# Altium PCB BASE.PcbDoc (part 2 of 5)
Units mil, origin at the board's own origin, x right, y up, seen from the top; angles counter-clockwise.
Board outline 4330.71 x 3937.01 mil, 6 copper layers (Top, GND1, SIG1, PWR, GND2, Bottom), stack 32.112 mil thick; 57 components, 250 nets, 665 pads, 350 vias.
Unrouted connection lines stored in the file: 2.
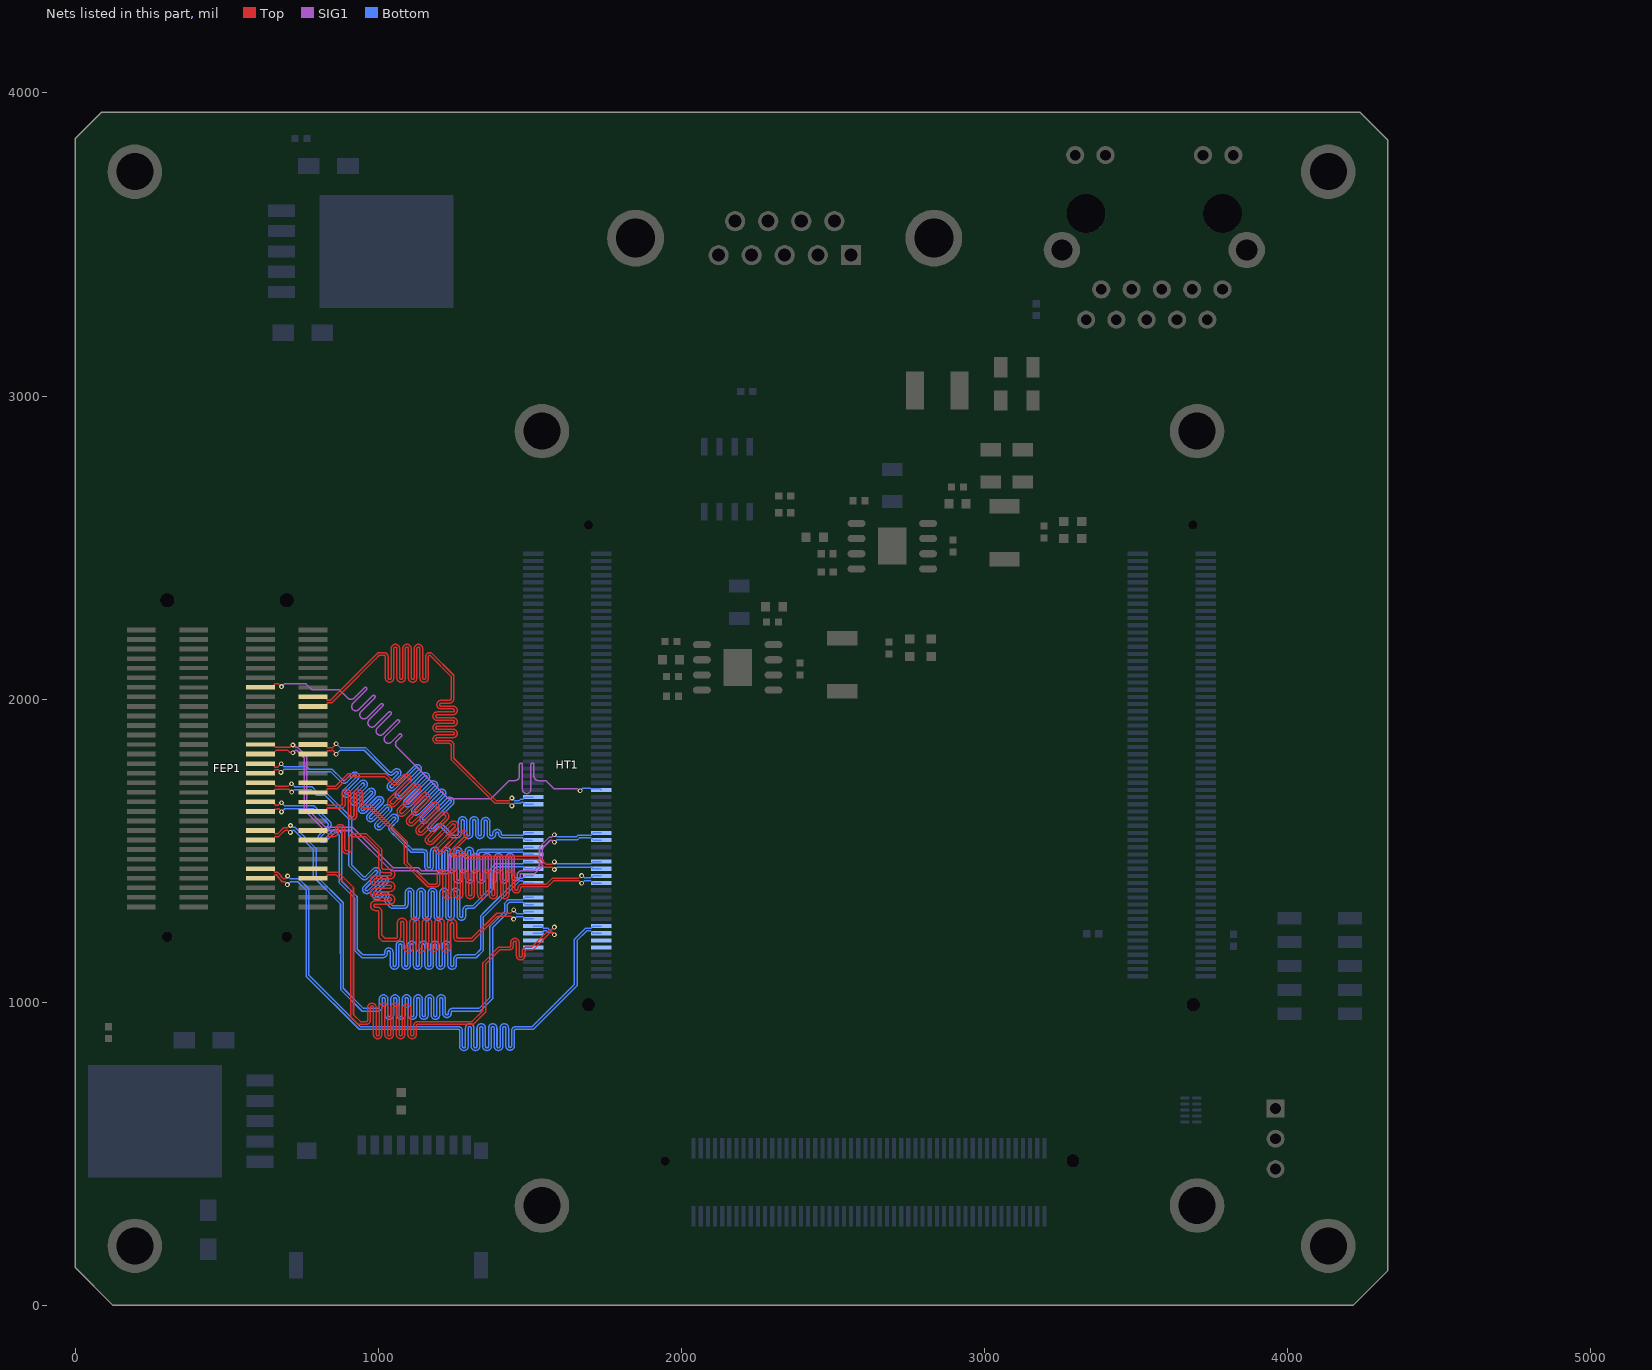
[diagram p6: the nets of this part, all layers, seen from the top]

## Via types
v1: diameter 16, hole 8, Top to Bottom, 219 vias
v2: diameter 30, hole 15, Top to Bottom, 75 vias
v3: diameter 22, hole 12, Top to Bottom, 48 vias
v4: diameter 28, hole 14, Top to Bottom, 3 vias
v5: diameter 39.37, hole 39.37, Top to Bottom, 2 vias
v6: diameter 24, hole 12, Top to Bottom, 2 vias
v7: diameter 40, hole 20, Top to Bottom, 1 vias

## Nets (pads, with @x,y where several pads share a name; then routed paths per layer and width w, separated by ;. In a path a pad name is that pad's centre, name@x,y a point inside that pad or via, vN(x,y) a via of type N, cw(c..) or ccw(c..) an arc to the next point about the centre after c; other vN are vias at no path point) (continued)
B12_L5_N: FEP1.A18 HT1.B16 | length 2428.8
  Top w5: FEP1.A18@784.41,1692.91 824.98,1692.91 828.98,1696.91 828.98,1701.23 831.91,1704.16 862.71,1704.16 903.2,1744.65 1021.6,1744.65 ; 1025.02,1741.24 1039.87,1726.39 1043.5,1722.75 1044.78,1721.47 ccw(c1055.78,1732.4) 1066.76,1721.46 1087.58,1742.29 cw(c1092.21,1737.71) 1096.79,1733.11 ; 1035.09,1649.54 cw(c1046.08,1660.47) 1035.13,1671.44 1096.78,1733.09 ; 1035.15,1649.48 ccw(c1046.08,1660.47) 1057.05,1649.52 1118.7,1711.17 ; 1066.2,1618.43 cw(c1077.19,1629.36) 1066.24,1640.33 1127.89,1701.98 ccw(c1123.32,1706.6) 1118.71,1711.19 ; 1066.26,1618.37 ccw(c1077.19,1629.36) 1088.16,1618.41 1149.81,1680.06 cw(c1154.43,1675.49) 1159.01,1670.88 ; 1097.31,1587.32 cw(c1108.3,1598.25) 1097.35,1609.22 1159,1670.87 ; 1097.37,1587.26 ccw(c1108.3,1598.25) 1119.27,1587.3 1180.92,1648.95 ; 1128.42,1556.2 cw(c1139.41,1567.13) 1128.46,1578.1 1190.12,1639.75 ccw(c1185.54,1644.38) 1180.94,1648.96 ; 1128.48,1556.14 ccw(c1139.41,1567.13) 1150.39,1556.18 1212.04,1617.83 cw(c1216.66,1613.26) 1221.24,1608.65 ; 1159.54,1525.09 cw(c1170.53,1536.02) 1159.58,1546.99 1221.23,1608.64 ; 1159.6,1525.03 ccw(c1170.53,1536.02) 1181.5,1525.07 1243.15,1586.72 ; 1190.65,1493.98 cw(c1201.64,1504.91) 1190.69,1515.88 1252.34,1577.53 ccw(c1247.77,1582.15) 1243.16,1586.73 ; 1190.71,1493.92 ccw(c1201.64,1504.91) 1212.61,1493.96 1274.26,1555.61 cw(c1278.88,1551.04) 1283.47,1546.43 1243.3,1506.26 ccw(c1254.25,1495.29) 1243.26,1484.36 ; 1243.32,1484.3 ccw(c1254.25,1495.29) 1265.22,1484.34 1268.94,1488.07 cw(c1273.56,1483.5) 1278.19,1488.06 1293.47,1472.79 1301.38,1472.79 1521.48,1472.79 1548.12,1446.15 1572.28,1446.15 1580.28,1438.15 v1(1580.71,1438.15)
  Bottom w5: v1(1580.71,1438.15) 1581.68,1438.15 1589.14,1445.61 1701.22,1445.61 1701.73,1445.1 1704.15,1445.1 1708.54,1440.71 HT1.B16@1735.12,1440.71
B12_L5_P: FEP1.A17 HT1.B17 | length 2433.5
  Top w5: FEP1.A17@784.41,1724.41 823.78,1724.41 829.15,1719.04 829.15,1716.09 832.08,1713.16 858.98,1713.16 899.48,1753.65 1025.33,1753.65 1030.51,1748.47 1046.23,1732.75 1049.86,1729.12 1051.16,1727.82 ccw(c1055.78,1732.4) 1060.39,1727.82 1081.24,1748.66 cw(c1092.21,1737.71) 1103.16,1726.74 1041.51,1665.09 ccw(c1046.08,1660.47) 1041.48,1655.88 ccw(c1046.08,1660.47) 1050.69,1655.89 1112.35,1717.55 cw(c1123.32,1706.6) 1134.27,1695.63 1072.62,1633.98 ; 1072.61,1633.97 ccw(c1077.19,1629.36) 1072.59,1624.76 ccw(c1077.19,1629.36) 1081.8,1624.78 ; 1081.81,1624.79 1143.46,1686.44 cw(c1154.43,1675.49) 1165.38,1664.52 1103.73,1602.87 ccw(c1108.3,1598.25) 1103.71,1593.65 ccw(c1108.3,1598.25) 1112.91,1593.66 1174.57,1655.33 cw(c1185.54,1644.38) 1196.49,1633.41 1134.84,1571.76 ; 1134.83,1571.74 ccw(c1139.41,1567.13) 1134.82,1562.54 ccw(c1139.41,1567.13) 1144.02,1562.55 ; 1144.04,1562.56 1205.69,1624.21 cw(c1216.66,1613.26) 1227.61,1602.29 1165.96,1540.64 ccw(c1170.53,1536.02) 1165.93,1531.42 ccw(c1170.53,1536.02) 1175.14,1531.44 1236.8,1593.1 cw(c1247.77,1582.15) 1258.72,1571.18 1197.07,1509.53 ; 1197.06,1509.52 ccw(c1201.64,1504.91) 1197.04,1500.31 ccw(c1201.64,1504.91) 1206.25,1500.33 ; 1206.26,1500.34 1267.91,1561.99 cw(c1278.88,1551.04) 1289.83,1540.07 1249.68,1499.91 ccw(c1254.25,1495.29) 1249.65,1490.69 ccw(c1254.25,1495.29) 1258.86,1490.71 1262.58,1494.43 ; 1262.58,1494.43 cw(c1273.56,1483.5) 1283.02,1495.77 1283.21,1495.77 1284.51,1494.47 ; 1284.54,1494.44 1297.19,1481.79 1310.38,1481.79 1527.71,1481.79 1554.34,1455.15 1572.28,1455.15 1580.28,1463.15 v1(1580.71,1463.15)
  Bottom w5: v1(1580.71,1463.15) 1582.75,1463.15 1589.14,1456.76 1659.36,1456.76 1659.62,1457.02 1701.23,1457.02 1708.54,1464.33 HT1.B17@1735.12,1464.33
B12_L6_N: FEP1.A20 HT1.B14 | length 2433.5
  Top w5: FEP1.A20@784.41,1629.92 823.78,1629.92 829.15,1635.3 829.15,1638.24 832.08,1641.17 869.8,1641.17 876.8,1641.17 ccw(c876.8,1655.17) 890.8,1655.17 890.8,1688.37 cw(c895.8,1688.37) 900.8,1688.37 900.8,1616.17 ccw(c914.8,1616.17) 928.8,1616.17 928.8,1688.37 cw(c933.8,1688.37) 938.8,1688.37 938.8,1655.17 ccw(c952.8,1655.17) 952.8,1641.17 970.42,1641.17 971.37,1640.22 1086.31,1525.28 1086.31,1457.65 1162.96,1381 1182.15,1381 1189.15,1381 ccw(c1189.15,1395) 1203.15,1395 1203.15,1424 cw(c1208.15,1424) 1213.15,1424 1213.15,1356 ccw(c1227.15,1356) 1241.15,1356 1241.15,1424 cw(c1246.15,1424) 1251.15,1424 1251.15,1356 ccw(c1265.15,1356) 1279.15,1356 1279.15,1424 cw(c1284.15,1424) 1289.15,1424 1289.15,1356 ccw(c1303.15,1356) 1317.15,1356 1317.15,1424 cw(c1322.15,1424) 1327.15,1424 1327.15,1356 ccw(c1341.15,1356) 1355.15,1356 1355.15,1424 cw(c1360.15,1424) 1365.15,1424 1365.15,1356 ccw(c1379.15,1356) 1393.15,1356 1393.15,1424 cw(c1398.15,1424) 1403.15,1424 1403.15,1356 ccw(c1417.15,1356) 1431.15,1356 1431.15,1424 cw(c1436.15,1424) 1441.15,1424 1441.15,1374.97 ccw(c1455.15,1374.97) 1469.15,1374.97 1469.15,1376 cw(c1474.15,1376) 1474.15,1381 1521.52,1381 1558.44,1381 1577.85,1400.41 1662.28,1400.41 1669.54,1393.15 v1(1670.71,1393.15)
  Bottom w5: v1(1670.71,1393.15) 1672.47,1393.15 1679.88,1400.56 1701.45,1400.56 1708.54,1393.46 HT1.B14@1735.12,1393.46
B12_L6_P: FEP1.A19 HT1.B15 | length 2433.8
  Top w5: FEP1.A19@784.41,1661.42 824.98,1661.42 828.98,1657.42 828.98,1653.1 831.91,1650.17 869.8,1650.17 876.8,1650.17 ccw(c876.8,1655.17) 881.8,1655.17 881.8,1688.37 cw(c895.8,1688.37) 909.8,1688.37 909.8,1616.17 ccw(c914.8,1616.17) 919.8,1616.17 919.8,1688.37 cw(c933.8,1688.37) 947.8,1688.37 947.8,1655.17 ccw(c952.8,1655.17) 952.8,1650.17 971.37,1650.17 974.15,1650.17 1095.31,1529 1095.31,1461.38 1166.69,1390 1182.15,1390 1189.15,1390 ccw(c1189.15,1395) 1194.15,1395 1194.15,1424 cw(c1208.15,1424) 1222.15,1424 1222.15,1356 ccw(c1227.15,1356) 1232.15,1356 1232.15,1424 cw(c1246.15,1424) 1260.15,1424 1260.15,1356 ccw(c1265.15,1356) 1270.15,1356 1270.15,1424 cw(c1284.15,1424) 1298.15,1424 1298.15,1356 ccw(c1303.15,1356) 1308.15,1356 1308.15,1424 cw(c1322.15,1424) 1336.15,1424 1336.15,1356 ccw(c1341.15,1356) 1346.15,1356 1346.15,1424 cw(c1360.15,1424) 1374.15,1424 1374.15,1356 ccw(c1379.15,1356) 1384.15,1356 1384.15,1424 cw(c1398.15,1424) 1412.15,1424 1412.15,1356 ccw(c1417.15,1356) 1422.15,1356 1422.15,1424 cw(c1436.15,1424) 1450.15,1424 1450.15,1374.97 ccw(c1455.15,1374.97) 1460.15,1374.97 1460.15,1376 cw(c1474.15,1376) 1474.15,1390 1521.52,1390 1554.71,1390 1574.58,1409.87 1662,1409.87 1670.28,1418.15 v1(1670.71,1418.15)
  Bottom w5: v1(1670.71,1418.15) 1672.68,1418.15 1679.14,1411.69 1701.22,1411.69 1702.23,1412.7 1704.15,1412.7 1708.54,1417.09 HT1.B15@1735.12,1417.09
B12_L7_N: HT1.B5
B12_L7_P: HT1.B6
B12_L8_N: FEP1.A27 HT1.A7 | length 2436.6
  Top w5: FEP1.A27@784.41,1409.45 823.78,1409.45 829.15,1414.82 829.15,1417.77 832.08,1420.7 860.18,1420.7 908.7,1372.18 908.7,953.33 934.67,927.36 959.71,927.36 ccw(c959.71,941.36) 973.71,941.36 973.71,983.18 cw(c978.71,983.18) 983.71,983.18 983.71,894.29 ccw(c997.71,894.29) 1011.71,894.29 1011.71,983.18 cw(c1016.71,983.18) 1021.71,983.18 1021.71,894.29 ccw(c1035.71,894.29) 1049.71,894.29 1049.71,983.18 cw(c1054.71,983.18) 1059.71,983.18 1059.71,894.29 ccw(c1073.71,894.29) 1087.71,894.29 1087.71,979.34 cw(c1092.71,979.34) 1097.71,979.34 1097.71,894.29 ccw(c1111.71,894.29) 1125.71,894.29 1125.71,922.36 cw(c1130.71,922.36) 1130.71,927.36 1313.07,927.36 1354.07,968.36 1354.07,1126.51 1400.71,1173.15 1431.71,1173.15 ccw(c1431.71,1187.15) 1445.71,1187.15 1445.71,1197.09 cw(c1450.71,1197.09) 1455.71,1197.09 1455.71,1154.08 ccw(c1469.71,1154.08) 1483.71,1154.08 1483.71,1168.15 cw(c1488.71,1168.15) 1488.71,1173.15 1510.14,1173.15 1568.14,1231.15 1572.28,1231.15 1580.28,1223.15 v1(1580.71,1223.15) ; v1@1578.81,1225.25 v1@1580.71,1227.15
  Bottom w5: HT1.A7@1510.71,1228.11 1537.28,1228.11 1544.59,1235.42 1555.77,1235.42 1560.04,1231.15 1572.28,1231.15 1580.28,1223.15 v1(1580.71,1223.15)
B12_L8_P: FEP1.A26 HT1.A8 | length 2434.1
  Top w5: FEP1.A26@784.41,1440.94 823.78,1440.94 829.15,1435.57 829.15,1432.63 832.08,1429.7 867.05,1429.7 918.13,1378.62 918.13,959.45 941.22,936.36 959.71,936.36 ccw(c959.71,941.36) 964.71,941.36 964.71,983.18 cw(c978.71,983.18) 992.71,983.18 992.71,894.29 ccw(c997.71,894.29) 1002.71,894.29 1002.71,983.18 cw(c1016.71,983.18) 1030.71,983.18 1030.71,894.29 ccw(c1035.71,894.29) 1040.71,894.29 1040.71,983.18 cw(c1054.71,983.18) 1068.71,983.18 1068.71,894.29 ccw(c1073.71,894.29) 1078.71,894.29 1078.71,979.34 cw(c1092.71,979.34) 1106.71,979.34 1106.71,894.29 ccw(c1111.71,894.29) 1116.71,894.29 1116.71,922.36 cw(c1130.71,922.36) 1130.71,936.36 1309.35,936.36 1345.07,972.09 1345.07,1130.24 1396.98,1182.15 1431.71,1182.15 ccw(c1431.71,1187.15) 1436.71,1187.15 1436.71,1197.09 cw(c1450.71,1197.09) 1464.71,1197.09 1464.71,1154.08 ccw(c1469.71,1154.08) 1474.71,1154.08 1474.71,1168.15 cw(c1488.71,1168.15) 1488.71,1182.15 1506.41,1182.15 1521.24,1196.98 1564.41,1240.15 1572.28,1240.15 1580.28,1248.15 v1(1580.71,1248.15)
  Bottom w5: HT1.A8@1510.71,1251.73 1537.28,1251.73 1544.59,1244.42 1559.5,1244.42 1563.77,1240.15 1572.28,1240.15 1580.28,1248.15 v1(1580.71,1248.15)
B12_L9_N: HT1.A5
B12_L9_P: HT1.A6
B12_L10_N: FEP1.A23 HT1.A9 | length 2434.4
  Top w5: FEP1.A23@784.41,1535.43 823.78,1535.43 829.15,1540.81 829.15,1543.75 832.08,1546.68 845.37,1546.68 852.37,1546.68 ccw(c852.37,1562.18) 867.87,1562.18 867.87,1570.87 cw(c874.37,1570.87) 880.87,1570.87 880.87,1506.01 ccw(c896.37,1506.01) 911.87,1506.01 911.87,1540.18 cw(c918.37,1540.18) 918.37,1546.68 937.66,1546.68 946.53,1546.68 957.18,1546.68 970.46,1533.4 1001.09,1502.77 1001.09,1452.06 1001.09,1444.11 ccw(c1016.98,1444.11) 1016.98,1428.22 1038.6,1428.22 cw(c1038.6,1423.22) 1038.6,1418.22 990.44,1418.22 ccw(c990.44,1402.33) 990.44,1386.44 1038.6,1386.44 cw(c1038.6,1381.44) 1038.6,1376.44 990.44,1376.44 ccw(c990.44,1360.55) 990.44,1344.66 1038.6,1344.66 cw(c1038.6,1339.66) 1038.6,1334.66 990.44,1334.66 ccw(c990.44,1318.78) 990.44,1302.89 996.09,1302.89 cw(c996.09,1297.89) 1001.09,1297.89 1001.09,1265.24 1001.09,1213.97 1014.06,1201 1050.25,1201 1058.03,1201 ccw(c1058.03,1216.57) 1073.6,1216.57 1073.6,1262.17 cw(c1078.6,1262.17) 1083.6,1262.17 1083.6,1181.25 ccw(c1099.17,1181.25) 1114.73,1181.25 1114.73,1262.17 cw(c1119.73,1262.17) 1124.73,1262.17 1124.73,1181.25 ccw(c1140.3,1181.25) 1155.87,1181.25 1155.87,1262.17 cw(c1160.87,1262.17) 1165.87,1262.17 1165.87,1181.25 ccw(c1181.44,1181.25) 1197.01,1181.25 1197.01,1262.17 cw(c1202.01,1262.17) 1207.01,1262.17 1207.01,1181.25 ccw(c1222.57,1181.25) 1238.14,1181.25 1238.14,1258.68 cw(c1243.14,1258.68) 1248.14,1258.68 1248.14,1216.57 ccw(c1263.71,1216.57) 1263.71,1201 1293.23,1201 1309.89,1201 1392.13,1283.24 1437.87,1283.24 1446.31,1274.8 v1(1446.31,1274.55)
  Bottom w5: v1(1446.31,1274.55) 1447.7,1274.55 1454.86,1281.71 1477.77,1281.71 1484.13,1275.35 HT1.A9@1510.71,1275.35
B12_L10_P: FEP1.A22 HT1.A10 | length 2434.2
  Top w5: FEP1.A22@784.41,1566.93 823.78,1566.93 829.15,1561.56 829.15,1558.61 832.08,1555.68 845.37,1555.68 849.1,1555.68 852.37,1555.68 ccw(c852.37,1562.18) 858.87,1562.18 858.87,1570.87 cw(c874.37,1570.87) 889.87,1570.87 889.87,1506.01 ccw(c896.37,1506.01) 902.87,1506.01 902.87,1540.18 cw(c918.37,1540.18) 918.37,1555.68 937.66,1555.68 946.53,1555.68 960.9,1555.68 1011.98,1504.61 1011.98,1452.06 1011.98,1444.11 ccw(c1016.98,1444.11) 1016.98,1439.11 1038.6,1439.11 cw(c1038.6,1423.22) 1038.6,1407.33 990.44,1407.33 ccw(c990.44,1402.33) 990.44,1397.33 1038.6,1397.33 cw(c1038.6,1381.44) 1038.6,1365.55 990.44,1365.55 ccw(c990.44,1360.55) 990.44,1355.55 1038.6,1355.55 cw(c1038.6,1339.66) 1038.6,1323.78 990.44,1323.78 ccw(c990.44,1318.78) 990.44,1313.78 996.09,1313.78 cw(c996.09,1297.89) 1011.98,1297.89 1011.98,1265.24 1011.98,1221.45 1021.86,1211.57 1050.25,1211.57 1058.03,1211.57 ccw(c1058.03,1216.57) 1063.03,1216.57 1063.03,1262.17 cw(c1078.6,1262.17) 1094.17,1262.17 1094.17,1181.25 ccw(c1099.17,1181.25) 1104.17,1181.25 1104.17,1262.17 cw(c1119.73,1262.17) 1135.3,1262.17 1135.3,1181.25 ccw(c1140.3,1181.25) 1145.3,1181.25 1145.3,1262.17 cw(c1160.87,1262.17) 1176.44,1262.17 1176.44,1181.25 ccw(c1181.44,1181.25) 1186.44,1181.25 1186.44,1262.17 cw(c1202.01,1262.17) 1217.57,1262.17 1217.57,1181.25 ccw(c1222.57,1181.25) 1227.57,1181.25 1227.57,1258.68 cw(c1243.14,1258.68) 1258.71,1258.68 1258.71,1216.57 ccw(c1263.71,1216.57) 1263.71,1211.57 1293.23,1211.57 1307.73,1211.57 1390.43,1294.26 1436,1294.26 1446.56,1304.82 v1(1446.82,1304.82)
  Bottom w5: v1(1446.82,1304.82) 1446.82,1302.62 1456.36,1293.08 1478.24,1293.08 1484.13,1298.98 HT1.A10@1510.71,1298.98
B12_L11_N: FEP1.B27 HT1.B7 | length 2434.5
  Top w5: FEP1.B27@611.18,1409.45 650.55,1409.45 655.93,1414.82 655.93,1417.77 658.85,1420.7 663,1420.7 670.73,1412.96 670.73,1410.7 683.34,1398.09 691.21,1398.09 700.02,1389.29 v1(700.02,1388.34)
  Bottom w5: v1(700.02,1388.34) 700.34,1388.34 710.08,1398.09 734.39,1398.09 761.71,1370.77 761.71,1086.27 936.98,911 1237.53,911 1263.53,911 cw(c1263.53,906) 1268.53,906 1268.53,854.78 ccw(c1282.53,854.78) 1296.53,854.78 1296.53,915.22 cw(c1301.53,915.22) 1306.53,915.22 1306.53,854.78 ccw(c1320.53,854.78) 1334.53,854.78 1334.53,915.22 cw(c1339.53,915.22) 1344.53,915.22 1344.53,854.78 ccw(c1358.53,854.78) 1372.53,854.78 1372.53,915.22 cw(c1377.53,915.22) 1382.53,915.22 1382.53,854.78 ccw(c1396.53,854.78) 1410.53,854.78 1410.53,915.22 cw(c1415.53,915.22) 1420.53,915.22 1420.53,856.06 ccw(c1434.53,856.06) 1448.53,856.06 1448.53,906 cw(c1453.53,906) 1453.53,911 1505.78,911 1511.71,911 1655.71,1055 1655.71,1203.78 1687.35,1235.42 1701.23,1235.42 1708.54,1228.11 HT1.B7@1735.12,1228.11
B12_L11_P: FEP1.B26 HT1.B8 | length 2434.3
  Top w5: FEP1.B26@611.18,1440.94 650.55,1440.94 655.93,1435.57 655.93,1432.63 658.85,1429.7 666.72,1429.7 679.73,1416.69 679.73,1414.42 687.07,1407.09 691.21,1407.09 700.66,1416.53 v1(700.66,1416.84)
  Bottom w5: v1(700.66,1416.84) 700.66,1416.52 710.08,1407.09 738.12,1407.09 770.71,1374.5 770.71,1090 940.71,920 1237.53,920 1263.53,920 cw(c1263.53,906) 1277.53,906 1277.53,854.78 ccw(c1282.53,854.78) 1287.53,854.78 1287.53,915.22 cw(c1301.53,915.22) 1315.53,915.22 1315.53,854.78 ccw(c1320.53,854.78) 1325.53,854.78 1325.53,915.22 cw(c1339.53,915.22) 1353.53,915.22 1353.53,854.78 ccw(c1358.53,854.78) 1363.53,854.78 1363.53,915.22 cw(c1377.53,915.22) 1391.53,915.22 1391.53,854.78 ccw(c1396.53,854.78) 1401.53,854.78 1401.53,915.22 cw(c1415.53,915.22) 1429.53,915.22 1429.53,856.06 ccw(c1434.53,856.06) 1439.53,856.06 1439.53,906 cw(c1453.53,906) 1453.53,920 1505.78,920 1507.98,920 1646.71,1058.73 1646.71,1207.51 1683.62,1244.42 1701.23,1244.42 1708.54,1251.73 HT1.B8@1735.12,1251.73
B12_L12_N: FEP1.B18 HT1.A16 | length 2431.7
  Top w5: FEP1.B18@611.18,1692.91 650.55,1692.91 660.31,1702.67 704.55,1702.67 713.84,1693.38 v1(714.18,1693.38)
  Bottom w5: v1(714.18,1693.38) 715.06,1693.38 723.48,1701.81 777.48,1701.81 796.02,1683.26 823.98,1683.26 838.98,1668.26 903,1604.25 903,1449.98 939.34,1413.64 944.27,1408.72 ccw(c954.19,1418.59) 964.12,1408.71 989.08,1433.68 ; 985.27,1361.98 ccw(c995.15,1352.06) 985.25,1342.16 ccw(c995.15,1352.06) 1005.07,1342.18 ; 985.28,1361.99 1023.03,1399.74 ; 989.11,1433.7 cw(c992.65,1430.17) 996.16,1433.72 ; 996.16,1426.61 952.1,1382.55 ccw(c961.97,1372.62) 952.07,1362.72 ccw(c961.97,1372.62) 971.89,1362.74 1015.95,1406.81 ; 996.18,1426.63 ccw(c992.65,1430.17) 996.2,1433.68 ; 1005.08,1342.19 1017.81,1354.92 ; 1015.98,1406.83 cw(c1019.52,1403.3) 1023.03,1406.85 ; 1017.83,1354.95 cw(c1021.37,1351.41) 1024.89,1354.97 ; 1023.05,1399.76 ccw(c1019.52,1403.3) 1023.07,1406.81 ; 1024.88,1347.85 ccw(c1034.8,1337.98) 1024.93,1328.05 1039.65,1313.33 1043.35,1309.63 1077.01,1309.63 1084.01,1309.63 ccw(c1084.01,1323.63) 1098.01,1323.63 1098.01,1362.26 cw(c1103.01,1362.26) 1108.01,1362.26 1108.01,1284.87 ccw(c1122.01,1284.87) 1136.01,1284.87 1136.01,1362.26 cw(c1141.01,1362.26) 1146.01,1362.26 1146.01,1284.87 ccw(c1160.01,1284.87) 1174.01,1284.87 1174.01,1362.26 cw(c1179.01,1362.26) 1184.01,1362.26 1184.01,1284.87 ccw(c1198.01,1284.87) 1212.01,1284.87 1212.01,1362.26 cw(c1217.01,1362.26) 1222.01,1362.26 1222.01,1284.87 ccw(c1236.01,1284.87) 1250.01,1284.87 1250.01,1362.26 cw(c1255.01,1362.26) 1260.01,1362.26 1260.01,1284.87 ccw(c1274.01,1284.87) 1288.01,1284.87 1288.01,1304.63 cw(c1293.01,1304.63) 1293.01,1309.63 1313.57,1309.63 1314.92,1309.63 1378.71,1373.42 1378.71,1436.02 1390.71,1448.02 1476.82,1448.02 1484.13,1440.71 HT1.A16@1510.71,1440.71 ; 1024.92,1347.89 ccw(c1021.37,1351.41) 1024.92,1354.93
B12_L12_P: FEP1.B17 HT1.A17 | length 2433
  Top w5: FEP1.B17@611.18,1724.41 650.55,1724.41 661.43,1713.53 703.48,1713.53 711.3,1721.35 v1(713.49,1721.35)
  Bottom w5: v1(713.49,1721.35) 713.84,1721.35 723.32,1711.86 780.15,1711.86 799.75,1692.26 827.71,1692.26 839.28,1680.69 912.79,1607.18 912.79,1475.59 912,1474.79 912,1454.84 912,1453.71 945.71,1420 950.64,1415.07 ccw(c954.19,1418.59) 957.75,1415.07 982.72,1440.04 cw(c992.65,1430.17) 1002.54,1440.07 cw(c992.65,1430.17) 1002.53,1420.25 958.46,1376.18 ; 958.43,1369.1 cw(c961.97,1372.62) 958.44,1376.16 ; 958.45,1369.08 ccw(c961.97,1372.62) 965.51,1369.09 1009.59,1413.17 ; 991.62,1348.52 ccw(c995.15,1352.06) 998.69,1348.53 ; 991.61,1348.54 cw(c995.15,1352.06) 991.61,1355.6 ; 991.64,1355.62 1029.39,1393.37 ; 998.71,1348.55 1011.45,1361.29 cw(c1021.37,1351.41) 1031.27,1361.31 cw(c1021.37,1351.41) 1031.25,1341.5 ccw(c1034.8,1337.98) 1031.28,1334.43 ; 1009.6,1413.18 cw(c1019.52,1403.3) 1029.41,1413.2 cw(c1019.52,1403.3) 1029.4,1393.38 ; 1031.29,1334.42 1046.02,1319.69 1047.08,1318.63 1077.01,1318.63 1084.01,1318.63 ccw(c1084.01,1323.63) 1089.01,1323.63 1089.01,1362.26 cw(c1103.01,1362.26) 1117.01,1362.26 1117.01,1284.87 ccw(c1122.01,1284.87) 1127.01,1284.87 1127.01,1362.26 cw(c1141.01,1362.26) 1155.01,1362.26 1155.01,1284.87 ccw(c1160.01,1284.87) 1165.01,1284.87 1165.01,1362.26 cw(c1179.01,1362.26) 1193.01,1362.26 1193.01,1284.87 ccw(c1198.01,1284.87) 1203.01,1284.87 1203.01,1362.26 cw(c1217.01,1362.26) 1231.01,1362.26 1231.01,1284.87 ccw(c1236.01,1284.87) 1241.01,1284.87 1241.01,1362.26 cw(c1255.01,1362.26) 1269.01,1362.26 1269.01,1284.87 ccw(c1274.01,1284.87) 1279.01,1284.87 1279.01,1304.63 cw(c1293.01,1304.63) 1293.01,1318.63 1311.19,1318.63 1313.57,1321.01 1369.71,1377.15 1369.71,1439.75 1386.98,1457.02 1476.82,1457.02 1484.13,1464.33 HT1.A17@1510.71,1464.33
B12_L13_N: FEP1.B16 HT1.A18 | length 2428.6
  Top w5: FEP1.B16@607.45,1755.91 FEP1.B16@611.18,1755.91 650.55,1755.91 655.93,1761.28 655.93,1764.22 658.85,1767.15 670.03,1767.15 672.67,1764.52
  Bottom w5: v1(678.46,1758.62) 679.04,1758.62 688.84,1768.41 759.88,1768.41 768.11,1760.18 843.68,1760.18 872.05,1731.81 875.68,1728.18 876.97,1726.89 ccw(c886.9,1736.76) 896.82,1726.88 919.17,1749.23 cw(c922.73,1745.72) 926.25,1742.17 884.8,1700.72 ccw(c894.67,1690.8) 904.6,1680.92 946.04,1722.36 cw(c949.6,1718.85) 953.12,1722.4 ; 953.15,1722.37 cw(c949.6,1718.85) 953.12,1715.3 911.67,1673.85 ccw(c921.54,1663.93) 931.47,1654.05 972.91,1695.49 cw(c976.47,1691.98) 979.99,1688.43 ; 979.98,1688.42 938.54,1646.98 ccw(c948.41,1637.06) 958.34,1627.18 999.78,1668.62 ; 999.78,1668.63 cw(c1003.34,1665.11) 1006.86,1668.66 ; 1006.89,1668.63 cw(c1003.34,1665.11) 1006.86,1661.56 965.41,1620.11 ccw(c975.28,1610.19) 985.21,1600.31 1026.65,1641.75 cw(c1030.21,1638.24) 1033.73,1634.69 992.28,1593.24 ccw(c1002.15,1583.32) 992.25,1573.42 ccw(c1002.15,1583.32) 1012.08,1573.44 1048.5,1609.86 cw(c1052.06,1606.35) 1055.58,1602.8 1038.24,1585.47 ccw(c1048.12,1575.54) 1038.25,1565.61 1052.88,1550.98 1056.51,1547.35 1108.59,1495.26 1148.09,1495.26 cw(c1148.09,1490.26) 1153.09,1490.26 1153.09,1448.64 ccw(c1167.09,1448.64) 1181.09,1448.64 1181.09,1497.38 cw(c1186.09,1497.38) 1191.09,1497.38 1191.09,1441.66 ccw(c1205.09,1441.66) 1219.09,1441.66 1219.09,1497.38 cw(c1224.09,1497.38) 1229.09,1497.38 1229.09,1441.66 ccw(c1243.09,1441.66) 1257.09,1441.66 1257.09,1497.38 cw(c1262.09,1497.38) 1267.09,1497.38 1267.09,1441.66 ccw(c1281.09,1441.66) 1295.09,1441.66 1295.09,1497.38 cw(c1300.09,1497.38) 1305.09,1497.38 1305.09,1441.66 ccw(c1319.09,1441.66) 1333.09,1441.66 1333.09,1490.26 cw(c1338.09,1490.26) 1338.09,1495.26 1476.82,1495.26 1484.13,1487.95 HT1.A18@1510.71,1487.95
B12_L13_P: FEP1.B15 HT1.A19 | length 2433.7
  Top w5: FEP1.B15@611.18,1787.4 650.55,1787.4 655.93,1782.03 655.93,1779.08 658.85,1776.15 668.57,1776.15 677.81,1785.4 v1@679.62,1785.4
  Bottom w5: v1(679.62,1787.21) 679.62,1786.63 688.84,1777.41 763.61,1777.41 771.84,1769.18 847.4,1769.18 878.41,1738.18 882.04,1734.54 883.34,1733.25 ccw(c886.9,1736.76) 890.45,1733.24 912.8,1755.6 cw(c922.73,1745.72) 932.6,1735.8 891.16,1694.36 ccw(c894.67,1690.8) 898.23,1687.28 ; 898.23,1687.29 939.67,1728.73 cw(c949.6,1718.85) 959.5,1728.75 cw(c949.6,1718.85) 959.47,1708.93 918.03,1667.49 ; 918.03,1667.48 ccw(c921.54,1663.93) 925.1,1660.41 966.54,1701.86 cw(c976.47,1691.98) 986.34,1682.06 944.9,1640.62 ccw(c948.41,1637.06) 951.97,1633.54 993.41,1674.99 cw(c1003.34,1665.11) 1013.24,1675.01 cw(c1003.34,1665.11) 1013.21,1655.19 971.77,1613.75 ccw(c975.28,1610.19) 978.84,1606.67 1020.28,1648.12 ; 998.63,1579.77 ccw(c1002.15,1583.32) 1005.71,1579.8 1042.13,1616.23 ; 998.6,1579.8 cw(c1002.15,1583.32) 998.64,1586.87 ; 998.64,1586.88 1040.08,1628.32 ccw(c1030.21,1638.24) 1020.28,1648.12 ; 1042.14,1616.23 cw(c1052.06,1606.35) 1061.93,1596.43 ; 1061.93,1596.43 1044.61,1579.1 ccw(c1048.12,1575.54) 1044.59,1571.99 1059.24,1557.34 1062.87,1553.71 1093.85,1522.74 1112.32,1504.26 1148.09,1504.26 cw(c1148.09,1490.26) 1162.09,1490.26 1162.09,1448.64 ccw(c1167.09,1448.64) 1172.09,1448.64 1172.09,1497.38 cw(c1186.09,1497.38) 1200.09,1497.38 1200.09,1441.66 ccw(c1205.09,1441.66) 1210.09,1441.66 1210.09,1497.38 cw(c1224.09,1497.38) 1238.09,1497.38 1238.09,1441.66 ccw(c1243.09,1441.66) 1248.09,1441.66 1248.09,1497.38 cw(c1262.09,1497.38) 1276.09,1497.38 1276.09,1441.66 ccw(c1281.09,1441.66) 1286.09,1441.66 1286.09,1497.38 cw(c1300.09,1497.38) 1314.09,1497.38 1314.09,1441.66 ccw(c1319.09,1441.66) 1324.09,1441.66 1324.09,1490.26 cw(c1338.09,1490.26) 1338.09,1504.26 1476.82,1504.26 1484.13,1511.57 HT1.A19@1510.71,1511.57
B12_L14_N: FEP1.B14 HT1.B20 | length 2429.8
  Top w5: FEP1.B14@611.18,1818.9 650.55,1818.9 662.78,1831.13 701.69,1831.13 707.8,1825.01 v1@714.04,1825.01
  SIG1 w5: v1(718.06,1823.35) 718.14,1823.35 726.48,1831.7 730.63,1831.7 755.52,1806.8 755.52,1634.7 823.28,1566.94 909.35,1566.94 1041.41,1434.88 1128.79,1434.88 1138.77,1424.9 1218.45,1424.9 1225.45,1424.9 ccw(c1225.45,1438.9) 1239.45,1438.9 1239.45,1476.79 cw(c1244.45,1476.79) 1249.45,1476.79 1249.45,1407.58 ccw(c1263.45,1407.58) 1277.45,1407.58 1277.45,1476.79 cw(c1282.45,1476.79) 1287.45,1476.79 1287.45,1407.58 ccw(c1301.45,1407.58) 1315.45,1407.58 1315.45,1476.79 cw(c1320.45,1476.79) 1325.45,1476.79 1325.45,1407.58 ccw(c1339.45,1407.58) 1353.45,1407.58 1353.45,1476.79 cw(c1358.45,1476.79) 1363.45,1476.79 1363.45,1407.58 ccw(c1377.45,1407.58) 1391.45,1407.58 1391.45,1476.79 cw(c1396.45,1476.79) 1401.45,1476.79 1401.45,1407.58 ccw(c1415.45,1407.58) 1429.45,1407.58 1429.45,1476.79 cw(c1434.45,1476.79) 1439.45,1476.79 1439.45,1415.17 ccw(c1453.45,1415.17) 1467.45,1415.17 1467.45,1419.9 cw(c1472.45,1419.9) 1472.45,1424.9 1514.15,1424.9 1516.4,1424.9 1540.71,1449.2 1540.71,1508.72 1566.87,1534.88 1571.01,1534.88 1571.34,1534.55 1572.28,1534.55 1578.68,1528.15 v1(1580.71,1528.15)
  Bottom w5: v1(1580.71,1528.15) 1581.14,1528.15 1589.14,1536.15 1657,1536.15 1663.35,1542.51 1701.23,1542.51 1708.54,1535.2 HT1.B20@1735.12,1535.2
B12_L14_P: FEP1.B13 HT1.B21 | length 2432.7
  Top w5: FEP1.B13@611.18,1850.39 651.93,1850.39 660.76,1841.56 707.6,1841.56 715.08,1849.04 v1(718.06,1849.04)
  SIG1 w5: v1(718.06,1849.04) 719.25,1849.04 726.48,1841.81 733.24,1841.81 764.52,1810.53 764.52,1638.43 825.51,1577.44 914.79,1577.44 1048.36,1443.88 1132.52,1443.88 1142.5,1433.9 1218.45,1433.9 1225.45,1433.9 ccw(c1225.45,1438.9) 1230.45,1438.9 1230.45,1476.79 cw(c1244.45,1476.79) 1258.45,1476.79 1258.45,1407.58 ccw(c1263.45,1407.58) 1268.45,1407.58 1268.45,1476.79 cw(c1282.45,1476.79) 1296.45,1476.79 1296.45,1407.58 ccw(c1301.45,1407.58) 1306.45,1407.58 1306.45,1476.79 cw(c1320.45,1476.79) 1334.45,1476.79 1334.45,1407.58 ccw(c1339.45,1407.58) 1344.45,1407.58 1344.45,1476.79 cw(c1358.45,1476.79) 1372.45,1476.79 1372.45,1407.58 ccw(c1377.45,1407.58) 1382.45,1407.58 1382.45,1476.79 cw(c1396.45,1476.79) 1410.45,1476.79 1410.45,1407.58 ccw(c1415.45,1407.58) 1420.45,1407.58 1420.45,1476.79 cw(c1434.45,1476.79) 1448.45,1476.79 1448.45,1415.17 ccw(c1453.45,1415.17) 1458.45,1415.17 1458.45,1419.9 cw(c1472.45,1419.9) 1472.45,1433.9 1512.68,1433.9 1514.15,1435.37 1529.64,1450.86 1531.71,1452.93 1531.71,1512.45 1564.55,1545.29 1572.28,1545.29 1580.14,1553.15 v1(1580.71,1553.15)
  Bottom w5: v1(1580.71,1553.15) 1582.78,1553.15 1589.14,1546.79 1654.91,1546.79 1659.63,1551.51 1701.23,1551.51 1708.54,1558.82 HT1.B21@1735.12,1558.82
B12_L15_N: FEP1.A9 HT1.A25 | length 2433.2
  Top w5: FEP1.A9@784.41,1976.38 823.78,1976.38 829.15,1981.75 829.15,1984.7 832.08,1987.63 846.06,1987.63 880.71,2022.27 992.71,2134.28 1003.44,2145 1018.35,2145 cw(c1018.35,2140) 1023.35,2140 1023.35,2070.32 ccw(c1037.35,2070.32) 1051.35,2070.32 1051.35,2167 cw(c1056.35,2167) 1061.35,2167 1061.35,2070.32 ccw(c1075.35,2070.32) 1089.35,2070.32 1089.35,2167 cw(c1094.35,2167) 1099.35,2167 1099.35,2070.32 ccw(c1113.35,2070.32) 1127.35,2070.32 1127.35,2167 cw(c1132.35,2167) 1137.35,2167 1137.35,2070.32 ccw(c1151.35,2070.32) 1165.35,2070.32 1165.35,2140 cw(c1170.35,2140) 1170.35,2145 1240.02,2075.33 1240.02,2001 cw(c1235.02,2001) 1235.02,1996 1207.11,1996 ccw(c1207.11,1982) 1207.11,1968 1246.31,1968 cw(c1246.31,1963) 1246.31,1958 1194.31,1958 ccw(c1194.31,1944) 1194.31,1930 1246.31,1930 cw(c1246.31,1925) 1246.31,1920 1194.31,1920 ccw(c1194.31,1906) 1194.31,1892 1246.31,1892 cw(c1246.31,1887) 1246.31,1882 1194.31,1882 ccw(c1194.31,1868) 1194.31,1854 1235.02,1854 cw(c1235.02,1849) 1240.02,1849 1240.02,1801.2 1384.63,1656.59 1432.28,1656.59 v1(1440.71,1648.15)
  Bottom w5: v1(1440.71,1648.15) 1449.14,1656.59 1468.64,1656.59 1472.67,1660.62 1476.82,1660.62 1484.13,1653.31 HT1.A25@1510.71,1653.31
B12_L15_P: FEP1.A8 HT1.A26 | length 2433.2
  Top w5: FEP1.A8@784.41,2007.87 823.78,2007.87 829.15,2002.5 829.15,1999.56 832.08,1996.63 842.33,1996.63 876.98,2031.27 999.71,2154 1018.35,2154 cw(c1018.35,2140) 1032.35,2140 1032.35,2070.32 ccw(c1037.35,2070.32) 1042.35,2070.32 1042.35,2167 cw(c1056.35,2167) 1070.35,2167 1070.35,2070.32 ccw(c1075.35,2070.32) 1080.35,2070.32 1080.35,2167 cw(c1094.35,2167) 1108.35,2167 1108.35,2070.32 ccw(c1113.35,2070.32) 1118.35,2070.32 1118.35,2167 cw(c1132.35,2167) 1146.35,2167 1146.35,2070.32 ccw(c1151.35,2070.32) 1156.35,2070.32 1156.35,2140 cw(c1170.35,2140) 1170.35,2154 1174.08,2154 1249.02,2079.06 1249.02,2001 cw(c1235.02,2001) 1235.02,1987 1207.11,1987 ccw(c1207.11,1982) 1207.11,1977 1246.31,1977 cw(c1246.31,1963) 1246.31,1949 1194.31,1949 ccw(c1194.31,1944) 1194.31,1939 1246.31,1939 cw(c1246.31,1925) 1246.31,1911 1194.31,1911 ccw(c1194.31,1906) 1194.31,1901 1246.31,1901 cw(c1246.31,1887) 1246.31,1873 1194.31,1873 ccw(c1194.31,1868) 1194.31,1863 1235.02,1863 cw(c1235.02,1849) 1249.02,1849 1249.02,1804.93 1388.36,1665.59 1432.18,1665.59 v1(1440.61,1674.03)
  Bottom w5: v1(1440.61,1674.03) 1449.04,1665.59 1464.91,1665.59 1468.94,1669.62 1476.82,1669.62 1484.13,1676.93 HT1.A26@1510.71,1676.93
B12_L16_N: FEP1.B23 HT1.A11 | length 2433.8
  Top w5: FEP1.B23@611.18,1535.43 650.55,1535.43 655.93,1540.81 655.93,1543.75 658.85,1546.68 670.8,1546.68 691.27,1567.15 701.37,1567.15 707.7,1560.81 v1(709.8,1560.81)
  Bottom w5: v1(709.8,1560.81) 711.75,1560.81 718.22,1567.29 722.37,1567.29 785.71,1503.95 785.71,1414.42 875.27,1324.86 875.27,1160 875.4,1159.87 875.4,1042.58 946.98,971 991.21,971 998.21,971 ccw(c998.21,985) 1012.21,985 1012.21,1010.82 cw(c1017.21,1010.82) 1022.21,1010.82 1022.21,958 ccw(c1036.21,958) 1050.21,958 1050.21,1010.82 cw(c1055.21,1010.82) 1060.21,1010.82 1060.21,958 ccw(c1074.21,958) 1088.21,958 1088.21,1010.82 cw(c1093.21,1010.82) 1098.21,1010.82 1098.21,958 ccw(c1112.21,958) 1126.21,958 1126.21,1010.82 cw(c1131.21,1010.82) 1136.21,1010.82 1136.21,958 ccw(c1150.21,958) 1164.21,958 1164.21,1010.82 cw(c1169.21,1010.82) 1174.21,1010.82 1174.21,958 ccw(c1188.21,958) 1202.21,958 1202.21,1010.82 cw(c1207.21,1010.82) 1212.21,1010.82 1212.21,963.82 ccw(c1226.21,963.82) 1240.21,963.82 1240.21,966 cw(c1245.21,966) 1245.21,971 1271.79,971 1335.69,971 1377.24,1012.55 1377.24,1049.04 1377.42,1049.23 1377.42,1247.14 1425.48,1295.19 1425.48,1322.69 1432.69,1329.91 1476.82,1329.91 1484.13,1322.6 HT1.A11@1510.71,1322.6
B12_L16_P: FEP1.B22 HT1.A12 | length 2434.8
  Top w5: FEP1.B22@611.18,1566.93 650.55,1566.93 655.93,1561.56 655.93,1558.61 658.85,1555.68 667.07,1555.68 688.01,1576.62 701.5,1576.62 708.24,1583.36 v1(710.2,1583.36)
  Bottom w5: v1(710.2,1583.36) 712.59,1583.36 718.63,1577.32 725.06,1577.32 794.71,1507.67 794.71,1418.15 884.52,1328.33 884.52,1163.73 884.4,1163.6 884.4,1046.31 950.71,980 991.21,980 998.21,980 ccw(c998.21,985) 1003.21,985 1003.21,1010.82 cw(c1017.21,1010.82) 1031.21,1010.82 1031.21,958 ccw(c1036.21,958) 1041.21,958 1041.21,1010.82 cw(c1055.21,1010.82) 1069.21,1010.82 1069.21,958 ccw(c1074.21,958) 1079.21,958 1079.21,1010.82 cw(c1093.21,1010.82) 1107.21,1010.82 1107.21,958 ccw(c1112.21,958) 1117.21,958 1117.21,1010.82 cw(c1131.21,1010.82) 1145.21,1010.82 1145.21,958 ccw(c1150.21,958) 1155.21,958 1155.21,1010.82 cw(c1169.21,1010.82) 1183.21,1010.82 1183.21,958 ccw(c1188.21,958) 1193.21,958 1193.21,1010.82 cw(c1207.21,1010.82) 1221.21,1010.82 1221.21,963.82 ccw(c1226.21,963.82) 1231.21,963.82 1231.21,966 cw(c1245.21,966) 1245.21,980 1271.79,980 1331.96,980 1368.2,1016.24 1368.2,1250.64 1416.48,1298.92 1416.48,1325.67 1416.1,1326.04 1416.48,1326.42 1428.97,1338.91 1476.82,1338.91 1484.13,1346.22 HT1.A12@1510.71,1346.22
B12_L17_N: FEP1.A14 HT1.A20 | length 2430.8
  Top w5: FEP1.A14@784.41,1818.9 823.78,1818.9 829.15,1824.27 829.15,1827.22 832.08,1830.15 844.03,1830.15 845.23,1831.35 849.37,1831.35 860.71,1820.01 v1(860.71,1818.35)
  Bottom w5: v1(860.71,1818.35) 873.71,1831.35 953.78,1831.35 1008.21,1776.92 1031.24,1753.89 ccw(c1041.17,1763.76) 1051.1,1753.88 1057.29,1760.07 cw(c1060.85,1756.56) 1064.37,1753.01 1033.4,1722.04 ccw(c1043.27,1712.11) 1053.19,1702.24 1124.61,1773.65 cw(c1128.17,1770.14) 1131.69,1773.7 ; 1106.93,1648.5 cw(c1097.01,1658.37) 1087.11,1648.47 cw(c1097.01,1658.37) 1087.13,1668.3 1158.55,1739.71 ccw(c1155.04,1743.27) 1151.49,1746.79 ; 1106.94,1648.5 1178.35,1719.91 cw(c1181.91,1716.4) 1185.43,1712.85 1114.01,1641.43 ccw(c1123.88,1631.5) 1133.8,1621.63 1205.22,1693.04 cw(c1208.78,1689.53) 1212.3,1685.98 ; 1131.68,1766.58 1060.27,1695.17 ccw(c1070.14,1685.24) 1080.06,1675.37 1151.48,1746.78 ; 1131.69,1766.59 ccw(c1128.17,1770.14) 1131.72,1773.66 ; 1198.83,1579.18 1187.55,1567.89 cw(c1177.62,1577.76) 1167.74,1587.69 1239.16,1659.1 ccw(c1235.65,1662.66) 1232.1,1666.18 ; 1198.84,1579.18 cw(c1202.39,1575.67) 1205.92,1579.21 ; 1205.95,1579.18 1210.88,1574.25 1225.88,1559.25 1242.62,1542.51 1251.94,1542.51 1258.94,1542.51 ccw(c1258.94,1556.51) 1272.94,1556.51 1272.94,1598.31 cw(c1277.94,1598.31) 1282.94,1598.31 1282.94,1554.31 ccw(c1296.94,1554.31) 1310.94,1554.31 1310.94,1598.31 cw(c1315.94,1598.31) 1320.94,1598.31 1320.94,1554.31 ccw(c1334.94,1554.31) 1348.94,1554.31 1348.94,1596.18 cw(c1353.94,1596.18) 1358.94,1596.18 1358.94,1554.31 ccw(c1372.94,1554.31) 1386.94,1554.31 1386.94,1556.51 cw(c1391.94,1556.51) 1396.94,1556.51 ccw(c1410.94,1556.51) 1410.94,1542.51 1429.87,1542.51 1476.82,1542.51 1484.13,1535.2 HT1.A20@1506.98,1535.2 ; 1212.29,1685.97 1140.88,1614.56 ccw(c1150.75,1604.63) 1140.85,1594.73 ccw(c1150.75,1604.63) 1160.67,1594.76 1232.09,1666.17
B12_L17_P: FEP1.A13 HT1.A21 | length 2434.5
  Top w5: FEP1.A13@784.41,1850.39 823.78,1850.39 829.15,1845.02 829.15,1842.07 832.08,1839.15 840.3,1839.15 841.5,1840.35 849.37,1840.35 860.71,1851.68 v1(860.71,1853.35)
  Bottom w5: v1(860.71,1853.35) 873.71,1840.35 957.51,1840.35 1014.58,1783.28 1037.62,1760.24 ccw(c1041.17,1763.76) 1044.73,1760.24 ; 1044.73,1760.25 1050.92,1766.43 cw(c1060.85,1756.56) 1070.72,1746.64 1039.76,1715.67 ccw(c1043.27,1712.11) 1046.82,1708.59 1118.25,1780.02 cw(c1128.17,1770.14) 1138.07,1780.04 cw(c1128.17,1770.14) 1138.05,1760.22 1066.63,1688.8 ccw(c1070.14,1685.24) 1073.69,1681.72 ; 1073.7,1681.73 1145.12,1753.15 cw(c1155.04,1743.27) 1164.92,1733.35 1093.5,1661.93 ; 1093.46,1654.85 cw(c1097.01,1658.37) 1093.49,1661.93 ; 1093.49,1654.82 ccw(c1097.01,1658.37) 1100.56,1654.85 1171.99,1726.28 ; 1127.43,1627.98 cw(c1123.88,1631.5) 1120.36,1635.06 1191.79,1706.48 ; 1127.44,1627.99 1198.86,1699.41 cw(c1208.78,1689.53) 1218.66,1679.61 1147.24,1608.19 ; 1147.23,1608.19 ccw(c1150.75,1604.63) 1147.2,1601.11 ccw(c1150.75,1604.63) 1154.3,1601.11 1225.73,1672.54 cw(c1235.65,1662.66) 1245.53,1652.74 1174.11,1581.32 ccw(c1177.62,1577.76) 1181.17,1574.24 1192.47,1585.54 cw(c1202.39,1575.67) 1212.32,1585.54 1217.24,1580.62 1246.35,1551.51 1251.94,1551.51 1258.94,1551.51 ccw(c1258.94,1556.51) 1263.94,1556.51 1263.94,1598.31 cw(c1277.94,1598.31) 1291.94,1598.31 1291.94,1554.31 ccw(c1296.94,1554.31) 1301.94,1554.31 1301.94,1598.31 cw(c1315.94,1598.31) 1329.94,1598.31 1329.94,1554.31 ccw(c1334.94,1554.31) 1339.94,1554.31 1339.94,1596.18 cw(c1353.94,1596.18) 1367.94,1596.18 1367.94,1554.31 ccw(c1372.94,1554.31) 1377.94,1554.31 1377.94,1556.51 cw(c1391.94,1556.51) 1405.94,1556.51 ccw(c1410.94,1556.51) 1410.94,1551.51 1429.87,1551.51 1476.82,1551.51 1484.13,1558.82 HT1.A21@1510.71,1558.82 ; 1171.99,1726.28 cw(c1181.91,1716.4) 1191.79,1706.48
B12_L18_N: FEP1.B20 HT1.A14 | length 2432.9
  Top w5: FEP1.B20@611.18,1629.92 650.55,1629.92 658.39,1637.76 666.32,1637.76 666.44,1637.88 672.47,1637.88 680.71,1629.64 v1(680.71,1628.35)
  Bottom w5: v1(680.71,1628.35) 691.21,1638.85 785.01,1638.85 800.71,1623.15 805.64,1618.21 833.31,1590.55 cw(c828.73,1585.93) 833.31,1581.32 806.49,1554.49 ccw(c817.42,1543.51) 828.4,1532.57 855.23,1559.39 ; 855.23,1559.4 cw(c859.85,1554.82) 864.46,1559.4 870.71,1553.15 870.71,1540.22 870.71,1395.42 921.64,1344.49 921.64,1171.67 945.95,1147.36 963.5,1147.36 1015.53,1147.36 ccw(c1015.53,1161.36) 1029.53,1161.36 1029.53,1165.38 cw(c1034.53,1165.38) 1039.53,1165.38 1039.53,1123.25 ccw(c1053.53,1123.25) 1067.53,1123.25 1067.53,1187.63 cw(c1072.53,1187.63) 1077.53,1187.63 1077.53,1123.25 ccw(c1091.53,1123.25) 1105.53,1123.25 1105.53,1187.63 cw(c1110.53,1187.63) 1115.53,1187.63 1115.53,1123.25 ccw(c1129.53,1123.25) 1143.53,1123.25 1143.53,1187.63 cw(c1148.53,1187.63) 1153.53,1187.63 1153.53,1123.25 ccw(c1167.53,1123.25) 1181.53,1123.25 1181.53,1187.63 cw(c1186.53,1187.63) 1191.53,1187.63 1191.53,1123.25 ccw(c1205.53,1123.25) 1219.53,1123.25 1219.53,1187.63 cw(c1224.53,1187.63) 1229.53,1187.63 1229.53,1123.25 ccw(c1243.53,1123.25) 1257.53,1123.25 1257.53,1142.36 cw(c1262.53,1142.36) 1262.53,1147.36 1269.53,1147.36 1323.07,1147.36 1346.88,1171.17 1346.88,1281.59 1444.44,1379.15 1444.55,1379.15 1466.17,1400.78 1476.82,1400.78 1484.13,1393.46 HT1.A14@1510.71,1393.46
B12_L18_P: FEP1.B19 HT1.A15 | length 2433
  Top w5: FEP1.B19@611.18,1661.42 650.55,1661.42 661.88,1650.09 669.48,1650.09 677.73,1658.35 v1(680.71,1658.35)
  Bottom w5: v1(680.71,1658.35) 691.21,1647.85 788.74,1647.85 807.07,1629.51 812.01,1624.58 ; 812.04,1624.55 839.67,1596.92 cw(c828.73,1585.93) 839.67,1574.95 812.85,1548.13 ccw(c817.42,1543.51) 822.03,1538.93 ; 822.04,1538.93 848.86,1565.75 cw(c859.85,1554.82) 870.83,1565.75 879.71,1556.88 879.71,1549.22 879.71,1399.15 925.07,1353.78 930.64,1348.22 930.64,1175.4 945.67,1160.37 949.68,1156.36 963.5,1156.36 1015.53,1156.36 ccw(c1015.53,1161.36) 1020.53,1161.36 1020.53,1165.38 cw(c1034.53,1165.38) 1048.53,1165.38 1048.53,1123.25 ccw(c1053.53,1123.25) 1058.53,1123.25 1058.53,1187.63 cw(c1072.53,1187.63) 1086.53,1187.63 1086.53,1123.25 ccw(c1091.53,1123.25) 1096.53,1123.25 1096.53,1187.63 cw(c1110.53,1187.63) 1124.53,1187.63 1124.53,1123.25 ccw(c1129.53,1123.25) 1134.53,1123.25 1134.53,1187.63 cw(c1148.53,1187.63) 1162.53,1187.63 1162.53,1123.25 ccw(c1167.53,1123.25) 1172.53,1123.25 1172.53,1187.63 cw(c1186.53,1187.63) 1200.53,1187.63 1200.53,1123.25 ccw(c1205.53,1123.25) 1210.53,1123.25 1210.53,1187.63 cw(c1224.53,1187.63) 1238.53,1187.63 1238.53,1123.25 ccw(c1243.53,1123.25) 1248.53,1123.25 1248.53,1142.36 cw(c1262.53,1142.36) 1262.53,1156.36 1269.53,1156.36 1319.35,1156.36 1337.88,1174.9 1337.88,1285.32 1351.44,1298.88 1462.33,1409.78 1476.82,1409.78 1484.13,1417.09 HT1.A15@1510.71,1417.09
B12_L19_N: FEP1.B7 HT1.B27 | length 2446.5
  Top w5: FEP1.B7@611.18,2039.37 650.55,2039.37 655.93,2044.74 655.93,2047.69 658.85,2050.62 671.05,2050.62 680.27,2041.4 v1(680.68,2041.4)
  SIG1 w5: v1@680.37,2041.21 680.75,2041.21 689.1,2049.56 ; v1(680.68,2041.4) 680.68,2041.8 689.51,2050.64 761.81,2050.64 781.74,2030.71 872.27,2030.71 894.62,2008.36 899.54,2003.44 ccw(c909.47,2013.31) 919.39,2003.44 953.99,2038.04 cw(c957.55,2034.53) 961.07,2038.08 ; 942.77,1958.94 ccw(c952.66,1949.03) 942.76,1939.13 ccw(c952.66,1949.03) 962.57,1939.14 1007.73,1984.3 ; 942.78,1958.95 987.93,2004.1 ; 961.06,2030.97 915.91,1985.82 ccw(c925.79,1975.9) 915.89,1966 ccw(c925.79,1975.9) 935.7,1966.01 980.86,2011.17 ; 961.09,2030.99 ccw(c957.55,2034.53) 961.1,2038.04 ; 969.64,1932.07 ccw(c979.53,1922.16) 969.63,1912.26 ccw(c979.53,1922.16) 989.44,1912.27 ; 969.65,1932.08 1014.8,1977.23 ; 980.88,2011.19 cw(c984.42,2007.66) 987.94,2011.21 ; 987.96,2004.12 ccw(c984.42,2007.66) 987.97,2011.17 ; 989.45,1912.28 1034.6,1957.43 ; 1007.75,1984.32 cw(c1011.29,1980.79) 1014.81,1984.34 ; 1014.83,1977.25 ccw(c1011.29,1980.79) 1014.84,1984.3 ; 1034.62,1957.45 cw(c1038.16,1953.92) 1041.68,1957.47 ; 1041.67,1950.36 996.52,1905.21 ccw(c1006.4,1895.29) 996.5,1885.39 ccw(c1006.4,1895.29) 1016.31,1885.4 1061.47,1930.56 ; 1041.7,1950.38 ccw(c1038.16,1953.92) 1041.71,1957.43 ; 1043.18,1858.53 cw(c1033.27,1868.42) 1023.37,1858.52 cw(c1033.27,1868.42) 1023.38,1878.33 1068.54,1923.49 ccw(c1065.03,1927.05) 1068.58,1930.56 ; 1043.19,1858.54 1068.66,1884.01 ; 1061.49,1930.58 cw(c1065.03,1927.05) 1068.55,1930.6 ; 1068.69,1884.04 cw(c1072.22,1880.5) 1075.74,1884.06 ; 1075.78,1884.02 cw(c1072.22,1880.5) 1075.76,1876.97 1060.81,1862.02 ccw(c1070.68,1852.09) 1060.82,1842.17 1075.33,1827.65 1231.47,1671.51 1371.79,1671.51 1432.07,1731.79 1444.48,1731.79 1451.48,1731.79 ccw(c1451.48,1745.79) 1465.48,1745.79 1465.48,1784.09 cw(c1470.48,1784.09) 1475.48,1784.09 1475.48,1702.67 ccw(c1489.48,1702.67) 1503.48,1702.67 1503.48,1784.09 cw(c1508.48,1784.09) 1513.48,1784.09 1513.48,1745.79 ccw(c1527.48,1745.79) 1527.48,1731.79 1549.66,1731.79 1552.07,1731.79 1578.76,1705.1 1657.28,1705.1 1664.23,1698.15 v1(1665.71,1698.15)
  Bottom w5: v1(1665.71,1698.15) 1666.14,1698.15 1674.14,1706.15 1700.26,1706.15 1701.47,1704.94 1730.73,1704.94 HT1.B27@1735.12,1700.55